# Altium PCB TransmitterPCB.PcbDoc
Units mm, origin at the board's own origin, x right, y up, seen from the top; angles counter-clockwise.
Board outline 30.61 x 17.14 mm, 2 copper layers (Top Layer, Bottom Layer); 20 components, 41 nets, 58 pads, 21 vias.
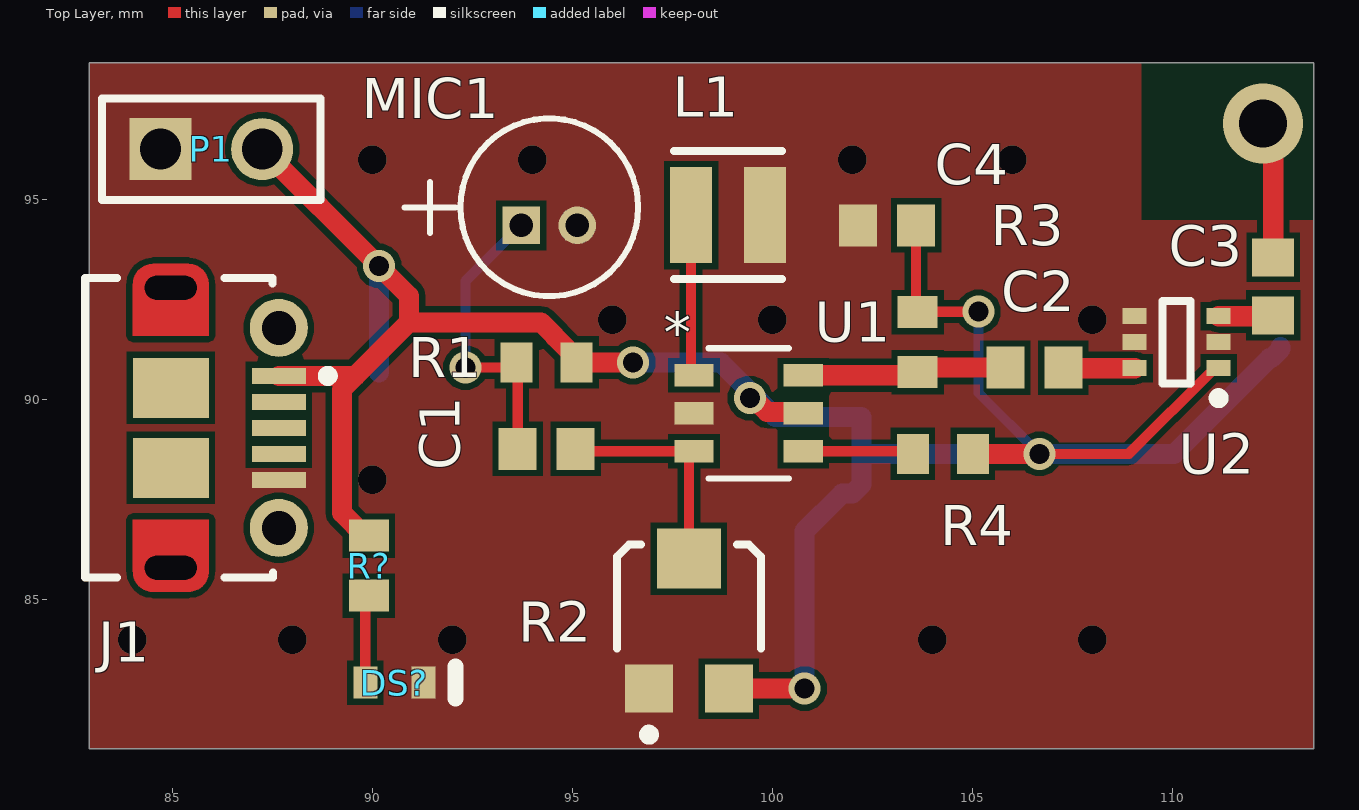
[diagram p0: Top Layer view]
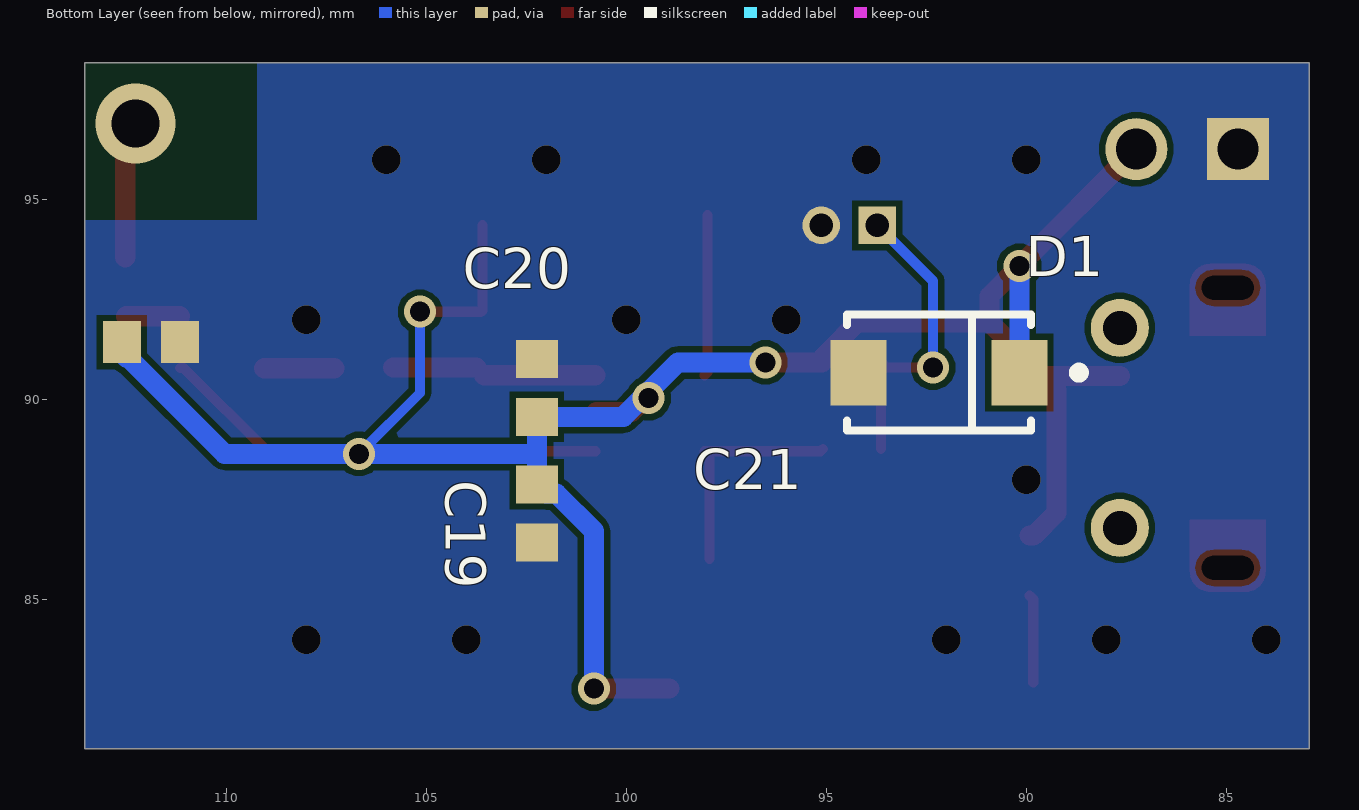
[diagram p1: Bottom Layer view, seen from below]
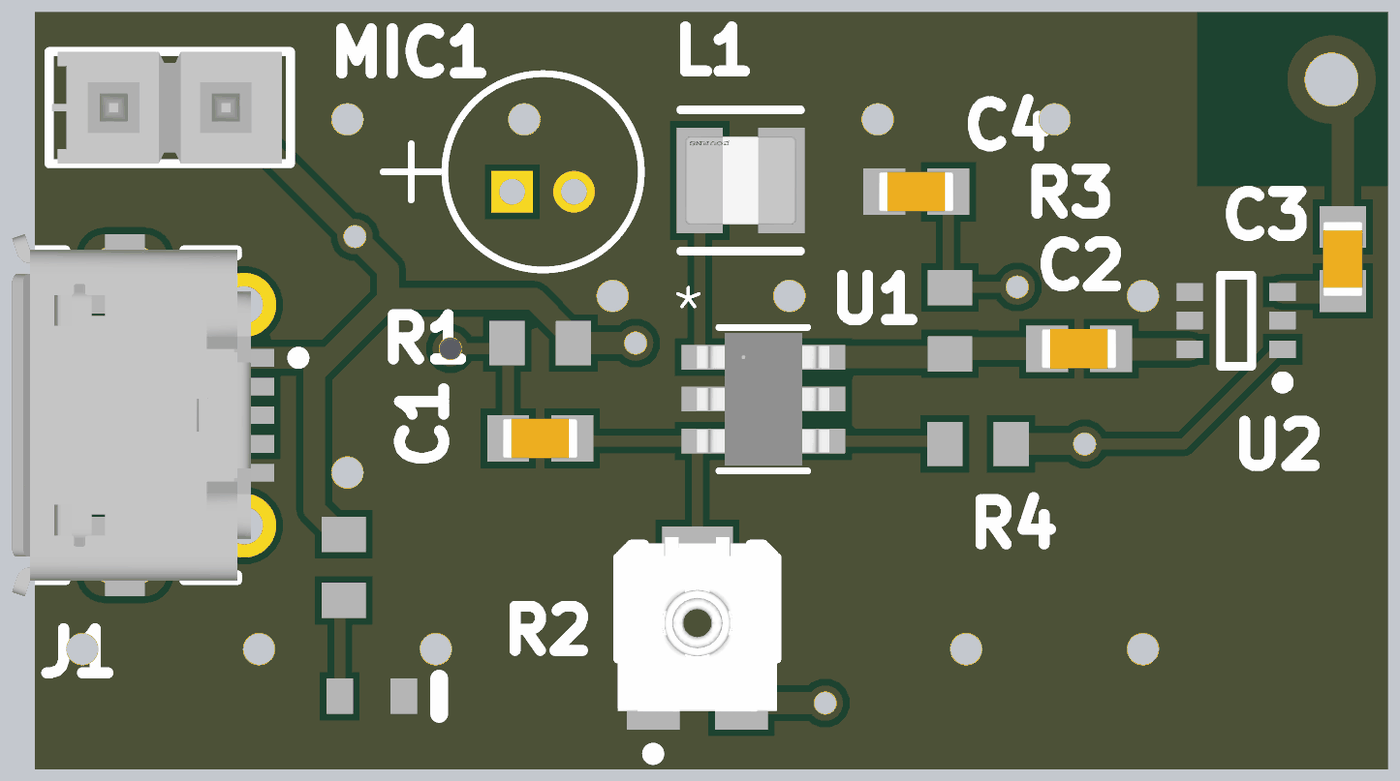
[diagram p2: 3D render of the assembled board from above, using the file's embedded part models]
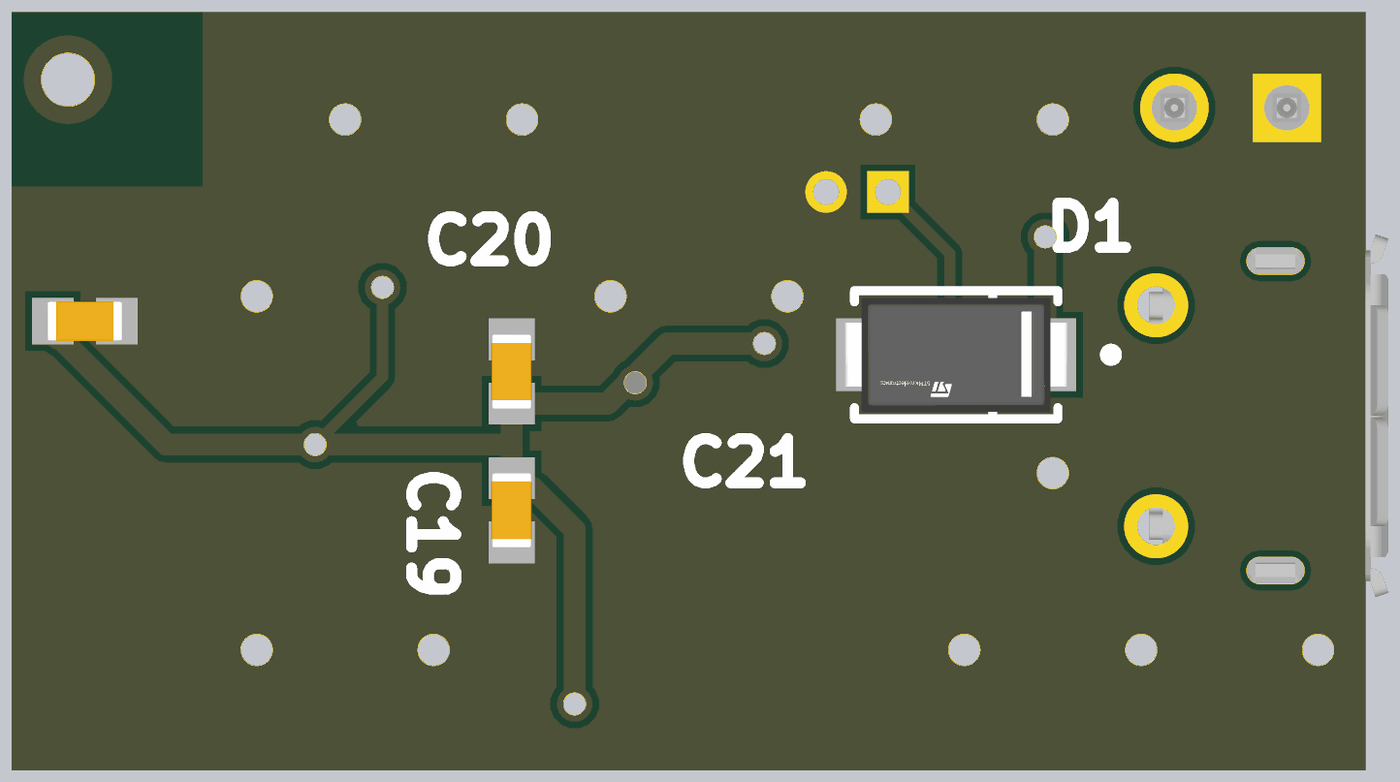
[diagram p3: 3D render of the assembled board from below, using the file's embedded part models]

## Layer stack, top to bottom
Top Solder: solder mask 0.0102, Solder Resist, Dk 3.5
Top Layer: signal copper 0.0356
Dielectric 1: dielectric 0.32, FR-4, Dk 4.8
Bottom Layer: signal copper 0.0356
Bottom Solder: solder mask 0.0102, Solder Resist, Dk 3.5

## Board outline
82.931,81.28 113.538,81.28 113.538,98.425 82.931,98.425

## Design rules (kind name [scope] priority, off if disabled: settings)
Clearance [All] p1: gap=0.15 ignorepadtopadclearanceinfootprint=FALSE
MinimumSolderMaskSliver [All] p1: minsoldermaskwidth=0.15
PolygonConnect [All] p1: connectstyle=Direct reliefconductorwidth=0.254 reliefentries=4 polygonreliefangle="90 Angle" airgapwidth=0.254
RoutingVias [All] p1: holewidth=0.711 width=1.27 viastyle="Through Hole" minholewidth=0.2 minwidth=0.4 maxholewidth=8 maxwidth=10
SolderMaskExpansion [All] p1: expansion=0 istentingtop=FALSE
SupplyNets "Schematic Supply Nets_1" [InNet('GND')] p1: voltage=0.000
SupplyNets "Schematic Supply Nets" [InNet('+5V')] p2: voltage=0.000
Width [All] p1: maxlimit=10 minlimit=0.1 preferedwidth=0.254 minimp=50.000000 maximp=50.000000 favimp=50.000000
29 further rules are at their usual default settings.

## Components (designator, comment, footprint, x,y, rotation, side; value= is the part's Value field where it differs from the comment)
C1 "1u" CAPC1608X90X35ML10T15 94.361,88.773 r0 top
C2 "100p" CAPC1608X90X35ML10T15 106.553,90.805 r0 top
C3 "100p" CAPC1608X90X35ML10T15 112.522,92.837 r90 top
C4 "100n" CAPC1608X90X35ML10T15 102.87,94.361 r0 top
C19 "1u" CAPC1608X90X35ML10T15 102.235,87.159 r90 bottom
C20 "1u" CAPC1608X90X35ML10T15 102.235,90.297 r270 bottom
C21 "1u" CAPC1608X90X35ML10T15 111.887,91.44 r0 bottom
D1 "SMAJ5.0A-TR" FP-SMA-MFG 92.185,90.678 r0 bottom
DS? "TLMS1000-GS08" VISH-TLMS1000_V 90.551,82.931 r0 top
J1 "105017-0001" USB-MICRO-B_V 86.313,89.297 r270 top
L1 "11nH" FP-SRN2512-MFG 98.897,94.615 r180 top
MIC1 "CMEJ-0415-42-P" CMEJ-0415_CUD 93.726,94.361 r0 top
P1 "TSW-102-26-F-S" SMTC-TSW-102-26-XX-S 84.709,96.266 r0 top
R1 "2k2" RESC1608X55X25ML10T15 94.361,90.932 r0 top
R2 "TC33X-2-103E" BOUR-TC33X-2_V 97.917,84.577 r90 top
R3 "1k" RESC1608X55X25ML10T15 103.632,91.44 r270 top
R4 "1k" RESC1608X55X25ML10T15 104.267,88.646 r0 top
R? "1k" RESC1608X55X25ML10T15 89.916,85.852 r270 top
U1 "MAX2608EUT+T" 21-0058I_MXM 99.409,89.662 r0 top
U2 "SMA3101-TL-E" ONSC-MCPH-6_V 110.109,91.44 r180 top

## Footprints (in the part's own frame and the unit in brackets; to place one, negate y for a bottom-side part, rotate by r counter-clockwise, add the part's x,y. Pads: shape width x height; smd on the part's side, far side on the other; paste and mask are expansions set on the pad)
21-0058I_MXM [mil]
  rect 38.5x22 smd paste+0 mask+0: 1(-53.75,37.4) 2(-53.75,0) 3(-53.75,-37.4) 4(53.75,-37.4) 5(53.75,0) 6(53.75,37.4)
  silkscreen extent -40,-64 40,64, body extent -59,-59 59,59, height 57
BOUR-TC33X-2_V [mm] "SMD, 3-Leads, Body 3.8x3.6mm"
  rect 1.2x1.2 smd: 1(-1.8,1) 3(-1.8,-1)
  rect 1.5x1.6 smd: 2(1.45,0)
  silkscreen extent -3.07,-1.8 1.8,1.8, body extent -2,-1.8 1.96,1.8, height 1.15
CAPC1608X90X35ML10T15 [mm] "Chip Capacitor, 2-Leads, Body 1.7x0.9mm, IPC Low Density"
  rect 0.95x1.05 smd: 1(-0.725,0) 2(0.725,0)
  body extent -0.85,-0.45 0.85,0.45, height 0.9
CMEJ-0415_CUD [mil]
  rect 37x37 / inner round 60 / far side rect 37x37 hole 23 paste-99999 mask+0: 1(0,0)
  round 37 / inner round 60 / far side round 37 hole 23 paste-99999 mask+0: 2(55.12,0)
  silkscreen extent -115,-70 115,105
FP-SMA-MFG [mm]
  rect 1.4x1.64 smd paste+0 mask+0: 1(-2.015,0) 2(2.015,0)
  silkscreen extent -3.62,-1.45 2.3,1.45, body extent -2.54,-1.29 2.54,1.29, height 2.65
FP-SRN2512-MFG [mm]
  rect 1.05x2.4 smd paste+0 mask+0: 1(-0.925,0) 2(0.925,0)
  silkscreen extent -1.35,-1.6 1.35,1.6, body extent -1.55,-1.3 1.55,1.3, height 0.25
ONSC-MCPH-6_V [mm] "SOT23, 6-Leads, Body 2x1.6mm, Pitch 0.65mm"
  rect 0.6x0.4 smd: 1(-1.05,0.65) 2(-1.05,0) 3(-1.05,-0.65) 4(1.05,-0.65) 5(1.05,0) 6(1.05,0.65)
  silkscreen extent -1.18,-1.03 0.35,1.52, body extent -0.8,-1 0.8,1, height 0.9
RESC1608X55X25ML10T15 [mm] "Chip Resistor, 2-Leads, Body 1.60x0.80mm, IPC Low Density"
  rect 0.8x1 smd: 1(-0.75,0) 2(0.75,0)
  body extent -0.85,-0.45 0.85,0.45, height 0.55
SMTC-TSW-102-26-XX-S [mm] ".025 SQ Post Terminal Strip Assembly, 1x2 Pins, Vertical, 2.54mm Pitch, Male"
  rect 1.55x1.55 hole 1.02: 1(0,0)
  round 1.55 hole 1.02: 2(2.54,0)
  silkscreen extent -1.46,-1.27 4,1.27, body extent -1.4,-1.27 3.81,1.27, height 8.38
USB-MICRO-B_V [mm] "USB, MICRO B, Body 7.491x4.695 mm, Pitch 0.65 mm"
  rect 0.4x1.35 smd: 1(-1.3,1.35) 2(-0.65,1.35) 3(0,1.35) 4(0.65,1.35) 5(1.3,1.35)
  round 1.45 hole 0.85: 6(-2.5,1.35) 7(2.5,1.35)
  rrect50% 0x0 hole 0.6 slot 1.3 at 90 deg: 8(-3.5,-1.35) 11(3.5,-1.35)
  rect 1.5x1.9 smd: 9(-1,-1.35) 10(1,-1.35)
  Top Layer circle w0.5: c-3.6,-1.8 r0.25
  Top Layer circle w0.5: c-3.6,-0.9 r0.25
  Top Layer circle w0.5: c3.6,-1.8 r0.25
  Top Layer circle w0.5: c3.6,-0.9 r0.25
  Top Layer region: -3.6,-1.8 -3.6,-0.9 -4.1,-0.9 -4.1,-1.8
  Top Layer region: 3.6,-0.9 3.6,-1.8 4.1,-1.8 4.1,-0.9
  Top Layer region: 2.3,-0.4 2.3,-2.3 3.6,-2.3 3.6,-0.4
  Top Layer region: -2.3,-2.3 -2.3,-0.4 -3.6,-0.4 -3.6,-2.3
  silkscreen extent -3.75,-3.5 3.75,2.7, body extent -4.1,-3.9 4.1,1.5, height 2.67
VISH-TLMS1000_V [mm] "SMD, 2-Leads, Body 0.8x1.6mm"
  rect 0.6x0.8 smd: 1(-0.725,0) 2(0.725,0)
  silkscreen extent 1.52,-0.4 1.52,0.4, body extent -0.8,-0.4 0.8,0.4, height 0.65

## Part data
C1 C2 C3 C4 C19 C20 C21: library part CMP-2100-03643-1, "Chip Capacitor, 0.1 uF, +/- 10%, 50 V, -55 to 125 degC, 0603 (1608 Metric), RoHS, Tape and Reel", Capacitance=100nF, Case Code (Imperial)=0603, Case Code (Metric)=1608, Dielectric=X7R, Dielectric Material=Ceramic, Insulation Resistance=10GR, Manufacturer=Murata, Max Operating Temperature=125degC, Min Operating Temperature=-55degC, Package Description="2-Pin Surface Mount Device, Body 1.6 x 0.8 mm", Package Quantity=1, Tolerance=10%, Voltage=50V, Case/Package=0603, Contact Plating=Tin, Datasheet URL=http://psearch.en.murata.com/capacitor/product/GRM188R71H104KA93%23.pdf, Datasheet Version=42675.0, Depth=0.8mm, Height=0.8mm, Lead Free=LeadFree, Length=1.6mm, Manufacturer URL=http://www.murata.com/, Material=Ceramic, Mount=SurfaceMount, Number of Pins=2, Package Reference=0603, Packaging=TapeandReel, Radiation Hardening=No, REACH SVHC=NoSVHC, RoHSCompliant=true, Termination=SMD/SMT, Thickness=0.035inch, Voltage Rating=50V, Voltage Rating (DC)=50V, Width=0.8mm
D1: library part CMP-12225-000048-1, "TVS DIODE 5V 13.4V SMA", Breakdown Voltage=6.4V, Clamping Voltage=9.2V, Manufacturer=STMicroelectronics, Max Junction Temp=+150°C, Package=SMA, Peak Pulse Current=43.5A, Peak Pulse Power=400W, Reverse Standoff Voltage=5V, Temperature="-55°C to +150°C", Temperature Range Low=-55°C, Automotive=No, Category=Diode, ComponentLink2Description=Datasheet, ComponentLink2URL=https://www.st.com/resource/en/datasheet/smaj.pdf, Device Class L1="Circuit Protection", Device Class L2="TVS Diodes", Device Class L3=unset, Digikey Description="TVS DIODE 5V 13.4V SMA", Direction=Unidirectional, Height=2.65mm, Lead Free=Yes, Manufacturer Part Number=SMAJ5.0A-TR, Mouser Description="Transient Voltage Suppressor, TVS, Transil SMAJ Series, Unidirectional, 5 V, DO-214AC, 2, 6.4 V", Number Of Channels=1, Octopart=https://octopart.com/smaj5.0a-tr-stmicroelectronics-347063, RoHS=TRUE, Standoff Height=0.05mm, Temperature Range High=+150°C
DS?: library part CMP-2000-07254-1, "Low Current LED, 40 mW, 1.8 V, -40 to 100 degC, 2-Pin SMD (0603), RoHS, Tape and Reel", Forward Current If=2mA, Forward Voltage=1.8V, LED Colour=Red, Manufacturer=Vishay, Package Description="2-Pin Surface Mount Device, Body 1.6 x 0.8 mm", Package Reference=TLMS1000, Automotive Qualification Standard=AEC-Q100, Bulb Size=1.6mmx0.8mm, Datasheet URL=https://datasheet.ciiva.com/5798/1698881-5798337.pdf, Datasheet Version="Rev. 1.7, 02/2011", LED Mounting=SMD, Lens Shape=Rectangular, Luminous Intensity=4mcd, Manufacturer URL=http://www.vishay.com/, Mounting Technology=SurfaceMount, MSL=MSL2-1year, Packaging=CutTape, Product Range=-, SVHC=ToBeAdvised, Viewing Angle=80°, Wavelength Typ=636nm
J1: library part CMP-2000-05827-1, "Micro-USB B Receptacle, Right Angle, Bottom Mount, Surface Mount, with Solder Tabs, -30 to 85 degC, 5-Pin USB, RoHS, Tape and Reel", Manufacturer=Molex, Package Description="5-Leads USB, Micro B, Body 7.5 x 5 mm, Pitch 0.65 mm", Package Reference=MICRO-B, Package Version="Rev. F, 12/2012", Standard Package=1, Voltage - Max=30V, 3D Model=105017-0001.stp, Catalog Drawings=1050170001, Category=Connectors,Interconnects, Circuits=5, Connector Type=USB-microB, Datasheet URL=http://www.molex.com/elqNow/elqRedir.htm?ref=http://www.molex.com/webdocs/datasheets/pdf/en-us/1050170001_IO_CONNECTORS.pdf, Datasheet Version=03/2016, Family=USB,DVI,HDMIConnectors, Featured Product=Micro-USBConnectorsUSBConnectors, Features=Shielded,SolderRetention, Gender=Receptacle, Ingress Protection=-, Manufacturer URL=http://www.molex.com/, Mating Products=WM17145-ND-CABLEMICROUSBBTOSTDA1.0MWM17147-ND-CABLEMICROUSBBTOSTDA2.0MWM17146-ND-CABLEMICROUSBBTOSTDA1.5M, Mounting Technology=SurfaceMount, Mounting Type=BoardCutout,SurfaceMount,RightAngle, Number of Contacts=5, Online Catalog=Molex-MicroUSB, Other Names=WM1399DKR, Package URL=http://www.molex.com/pdm_docs/sd/1050170001_sd.pdf, Packaging=Digi-Reel®, PCN Assembly/Origin=ResinSupplier21/Oct/2015, RoHS Information=1050170001CertofCompliance, Series=-, Specifications=-
L1: library part CMP-07248-000049-1, "FIXED IND 240NH 4.7A 24 MOHM SMD", Case Code (Imperial)=1008, Case Code (Metric)=2520, Current Rating=4.7A, DC Resistance (DCR)=24mR, Inductance=240nH, Inductance Tolerance=20%, Max Operating Temperature=125°C, Min Operating Temperature=-55°C, Package Quantity=2000, Resistor Type=Wirewound, Saturation Current=8A, Self Resonant Frequency=330MHz, Test Frequency=1MHz, Case/Package=1008, Core Material=Ferrite, Depth=2mm, Height=1.2mm, Height - Seated (Max)=0.047inch, Length=2.5mm, Max DC Current=4.7A, Mount="Surface Mount", Packaging="Tape and Reel", REACH SVHC="No SVHC", RMS Current (Irms)=4.7A, RoHS Compliant=Yes, Shielding=Shielded, Termination=SMD/SMT, Tolerance=20%, Weight=0.001058oz, Width=0.079inch
MIC1: "No Description Available", Mfr_Name="Same Sky", RefDes=RefDes, Type=Type
P1: library part CMP-1024-00329-1, "0.025\" SQ Post Header, Through-hole, Vertical, -55 to 125 degC, 2.54 mm Pitch, 2-Pin, Male, RoHS", Manufacturer=Samtec, Temperature Range="-55 to 125 degC", ComponentLink1Description="Manufacturer URL", ComponentLink1URL=http://www.samtec.com, ComponentLink2Description=Datasheet, ComponentLink2URL=http://www.samtec.com/documents/webfiles/pdf/TSW_TH.PDF, ComponentLink3Description="Package Specification", ComponentLink3URL=http://www.samtec.com/documents/webfiles/cpdf/TSW-XXX-XX-XXX-X-XX-XXX-MKT.pdf, DatasheetVersion=F-214, Mounting Technology=Through-hole, Orientation=Vertical, PackageDescription=".025[0.64] SQ. Post Terminal Strip Assembly", PackageReference=TSW-102-26-XX-S, PackageVersion="DM, 8/1988", PartNumber=TSW-102-26-F-S, Pitch="2.54 mm", RoHS=True
R1 R3 R4 R?: library part CMP-2100-03667-1, "Chip Resistor, 0 Ohm, +/- 5%, 0.1 W, -55 to 155 degC, 0603 (1608 Metric), RoHS, Tape and Reel", Case Code (Imperial)=0603, Case Code (Metric)=1608, Manufacturer=Yageo, Max Operating Temperature=155degC, Min Operating Temperature=-55degC, Package Description="2-Pin Surface Mount Device, Body 1.6 x 0.8 mm", Package Quantity=5000, Power Rating=100mW, Resistance=0mOhm, Temperature Coefficient=200ppm/degreesC, Tolerance=5%, Voltage Rating=50V, Case/Package=0603, Composition=ThickFilm, Contact Plating=Tin, Datasheet URL=http://www.yageo.com/NewPortal/yageodocoutput?fileName=/pdf/R-Chip/PYu-RC_Group_51_RoHS_L_5.pdf, Datasheet Version="Rev. 5, 10/2016", Depth=0.8mm, Height=0.45mm, Lead Free=LeadFree, Length=1.6mm, Manufacturer URL=http://www.yageo.com/, Military Standard=Not, Number of Pins=2, Package Reference=0603, Packaging=TapeandReel, Radiation Hardening=No, REACH SVHC=NoSVHC, RoHSCompliant=true, Termination=SMD/SMT, Voltage Rating (DC)=50V, Width=0.8mm
R2: library part CMP-2100-03695-1, "Trimming Potentiometer, 10000 Ohm, -40 to 100 degC, 3-Pin SMD, RoHS, Tape and Reel", Case/Package=SMD/SMT, Colour=Silver, Manufacturer=Bourns, Max Operating Temperature=100degC, Max Power Dissipation=100mW, Min Operating Temperature=-40degC, Package Description="3-Pin Surface Mount Device, Body 3.8 x 3.6 mm", Package Quantity=2500, Package Reference=TC33X-2, Resistance=10KOhm, Temperature Coefficient=250ppm/degreesC, Tolerance=25%, Voltage Rating (DC)=50V, Composition=Potentiometer, Contact Plating=Silver, Datasheet URL=http://www.bourns.com/docs/Product-Datasheets/TC33.pdf, Datasheet Version=42583.0, Depth=3.8mm, Height=0.047inch, Lead Free=LeadFree, Length=3mm, Manufacturer URL=http://www.bourns.com/, Military Standard=Not, Mount=SurfaceMount, Number of Turns=1, Packaging=TapeandReel, Power Rating=100mW, Radiation Hardening=No, REACH SVHC=NoSVHC, RoHSCompliant=true, Taper=Linear, Termination=FootPrint, Weight=29.4mg, Width=0.118inch
U1: "No Description Available", Mfr_Name="Analog Devices / Maxim Integrated", RefDes=RefDes, Type=Type
U2: library part CMP-1314-00002-1, "MMIC, Amplifier, 5 V, 10 mA, 0.1 to 3 GHz, 4.5 to 5.5 V, -40 to 85 degC, 6-Pin MCPH, Pb-Free, Tape and Reel", Manufacturer="On Semiconductor", Power Gain Max (dB)=28.5, Power Gain Min (dB)=21.5, Upper Freq (3 dB) (GHz)=3, ComponentLink1Description="Manufacturer URL", ComponentLink1URL=http://www.onsemi.com/, ComponentLink2Description=Datasheet, ComponentLink2URL=http://www.onsemi.com/pub_link/Collateral/ENA1431A-D.PDF, ComponentLink3Description="Package Specification", ComponentLink3URL=http://www.onsemi.com/pub_link/Collateral/ENA1601-D.PDF, DatasheetVersion="Rev. 1", ICC Max (mA)=12.6, ICC Min (mA)=7.1, Mounting Technology="Surface Mount", Noise Figure Max (dB)=5.3, PackageDescription="6-Pin Small Outline Transistor, Body 2 x 1.6 mm, Pitch 0.65 mm", PackageReference=MCPH-6, Packing="Tape and Reel", PartNumber=SMA3101-TL-E, RoHS=TRUE, VCC Max (V)=5.5, VCC Min (V)=4.5

## Via types
v1: diameter 0.711, hole 0.711, Top Layer to Bottom Layer, 13 vias
v2: diameter 0.8, hole 0.5, Top Layer to Bottom Layer, 7 vias
v3: diameter 2, hole 1.2, Top Layer to Bottom Layer, 1 vias

## Nets (pads, with @x,y where several pads share a name; then routed paths per layer and width w, separated by ;. In a path a pad name is that pad's centre, name@x,y a point inside that pad or via, vN(x,y) a via of type N, cw(c..) or ccw(c..) an arc to the next point about the centre after c; other vN are vias at no path point)
+5V: C4.2 C19.2 C20.2 C21.2 D1.1 J1.1 P1.2 R1.2 R2.3 R3.1 R4.2 R?.1 U1.5 U2.1 | length 66.7
  Top Layer w0.254: C4.2 103.595,92.227 R3.1 103.644,92.202 v2(105.156,92.202) ; v2(106.68,88.646) 108.915,88.646 111.059,90.79 U2.1
  Top Layer w0.5: P1.2 v2(90.17,93.345) 90.92,92.595 90.92,91.936 ; J1.1 89.581,90.597 ; R?.1 89.816,86.602 89.244,87.174 89.244,90.26 89.581,90.597 ; v2(96.52,90.932) R1.2 95.111,91.032 94.573,91.57 94.573,91.582 94.22,91.936 90.92,91.936 ; R2.3 v2(100.811,82.777) ; v2(99.441,90.043) 99.522,90.043 99.874,89.691 100.745,89.691 U1.5 ; R4.2 v2(106.68,88.646) ; 89.581,90.597 90.92,91.936
  Bottom Layer w0.254: v2(105.156,92.202) 105.156,90.17 v2(106.68,88.646)
  Bottom Layer w0.5: D1.1 v2(90.17,93.345) ; v2(96.52,90.932) 98.713,90.932 100.073,89.572 C20.2 102.235,88.728 ; v2(100.811,82.777) 100.811,86.723 101.747,87.659 102.01,87.659 C19.2 102.235,88.728 ; C21.2@112.709,91.313 112.709,91.263 112.484,91.038 112.434,91.038 110.042,88.646 v2(106.68,88.646) 102.317,88.646 102.235,88.728
ANT: C3.2 | length 3.4
  Top Layer w0.254: v3(112.268,96.901) v3@112.522,96.647
  Top Layer w0.508: C3.2 v3@112.522,96.647
ANT_REC: 
GND: C4.1 C19.1 C20.1 C21.1 D1.2 DS?.2 J1.5 L1.1 MIC1.2 P1.1 R2.1 U1.2 U2.2 U2.4 U2.5
  other v1: 84,84 88,84 92,84 104,84 108,84 90,88 96,92 100,92 108,92 90,96 94,96 102,96 106,96
IF: 
IF_AMP: 
LO: 
NetC1_1: C1.1 MIC1.1 R1.1 | length 7.8
  Top Layer w0.254: v2(92.329,90.805) 93.484,90.805 R1.1 93.636,90.907 C1.1 ; MIC1.1@93.611,94.246 MIC1.1
  Bottom Layer w0.254: v2(92.329,90.805) 92.329,92.964 MIC1.1
NetC1_2: C1.2 R2.2 U1.3 | length 5.7
  Top Layer w0.254: C1.2 95.147,88.712 U1.3 97.917,88.585 R2.2
NetC2_1: C2.1 R3.2 U1.6 | length 5.1
  Top Layer w0.254: R3.2@103.554,90.612 R3.2 R3.2@103.747,90.805
  Top Layer w0.508: U1.6 R3.2@103.554,90.612 ; R3.2@103.747,90.805 C2.1
NetC2_2: C2.2 U2.6 | length 1.8
  Top Layer w0.254: C2.2 C2.2@107.293,90.79
  Top Layer w0.508: C2.2@107.293,90.79 U2.6
NetC3_1: C3.1 U2.3 | length 1.4
  Top Layer w0.254: C3.1@112.5,92.09 C3.1
  Top Layer w0.508: U2.3 C3.1@112.5,92.09
NetC5_1: 
NetC5_2: 
NetC6_1: 
NetC6_2: 
NetC8_1: 
NetC10_2: 
NetC11_1: 
NetC12_2: 
NetC14_1: 
NetC14_2: 
NetC15_2: 
NetC16_1: 
NetC17_1: 
NetC17_2: 
NetC18_1: 
NetDS1_1: 
NetDS?_1: DS?.1 R?.2 | length 2.2
  Top Layer w0.254: DS?.1 89.826,85.012 R?.2
NetL1_2: L1.2 U1.1 | length 4
  Top Layer w0.254: L1.2 97.972,90.684 U1.1
NetL3_2: 
NetL4_1: 
NetR4_1: R4.1 U1.4 | length 2.8
  Top Layer w0.254: U1.4 103.451,88.712 R4.1
NetR7_1: 
NetR9_2: 
NetR10_1: 
NetR11_2: 
NetR12_2: 
NetU7_3: 
PC1: 
SPK_OUT: 
pads on no net: J1.2 J1.3 J1.4 J1.6 J1.7 J1.8 J1.9 J1.10 J1.11

## Polygon pours and split planes (outlines as drawn)
GND on Top Layer "GND_L01_P003" (solid, pour order 3): 82.931,98.425 109.22,98.425 109.22,94.488 113.538,94.488 113.538,81.28 82.931,81.28
GND on Top Layer "GND_L01_P001" (solid, pour order 1): 99.187,92.964 102.87,92.964 102.87,97.536 99.187,97.536 99.187,95.758
GND on Bottom Layer "GND_L02_P004" (solid, pour order 4): 82.931,98.425 109.22,98.425 109.22,94.488 113.538,94.488 113.538,81.28 82.931,81.28

## Text inside footprints (layer, text, board x,y; h text height)
J1: Mechanical 1 "PCB EDGE" at 83.413,96.497 h1 r270
U1: Top Overlay "*" at 97.282,91.186 h1; Mechanical 13 "*" at 98.596,89.814 h1